# Altium PCB TL061main.PcbDoc
Units mil, origin at the board's own origin, x right, y up, seen from the top; angles counter-clockwise.
Board outline 1720 x 1335 mil, 2 copper layers (Top Layer, Bottom Layer); 8 components, 6 nets, 32 pads, 0 vias.
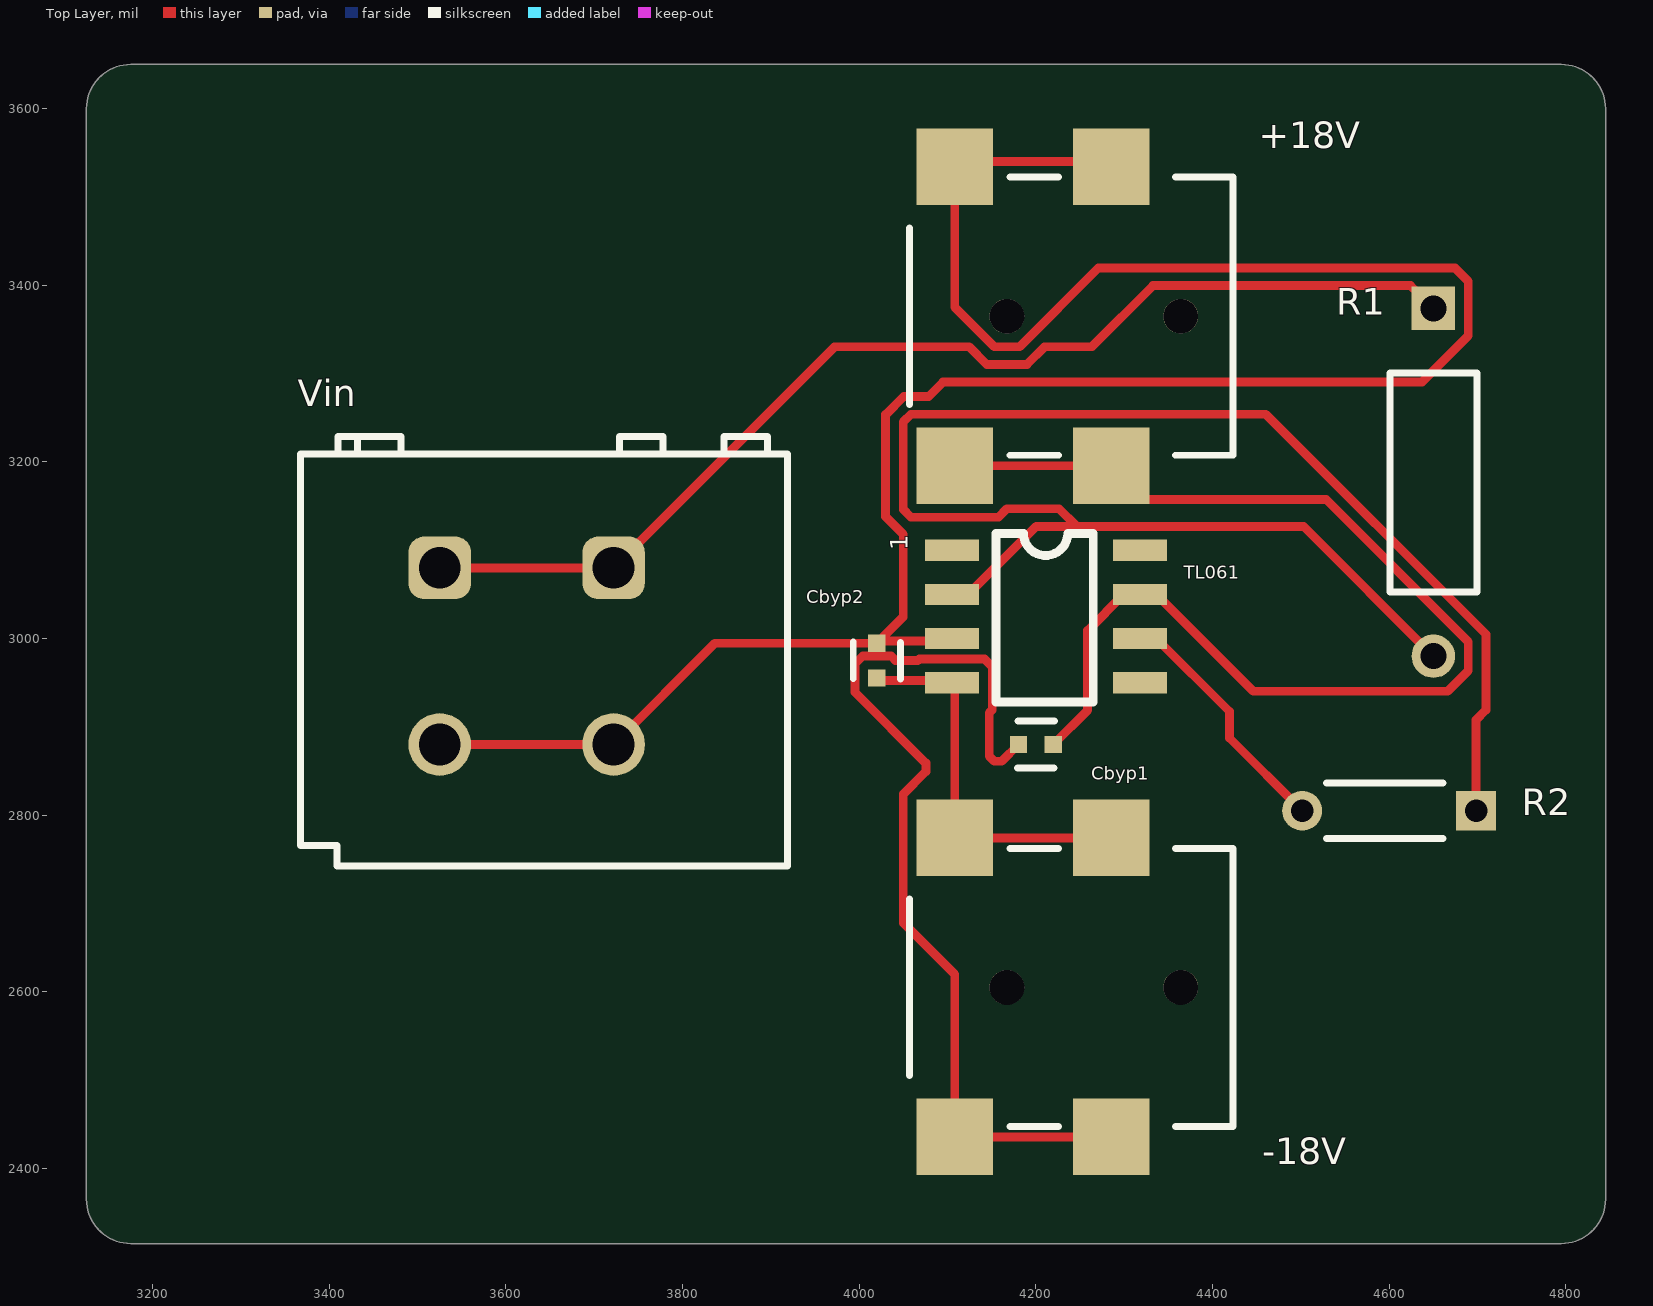
[diagram p0: Top Layer view]
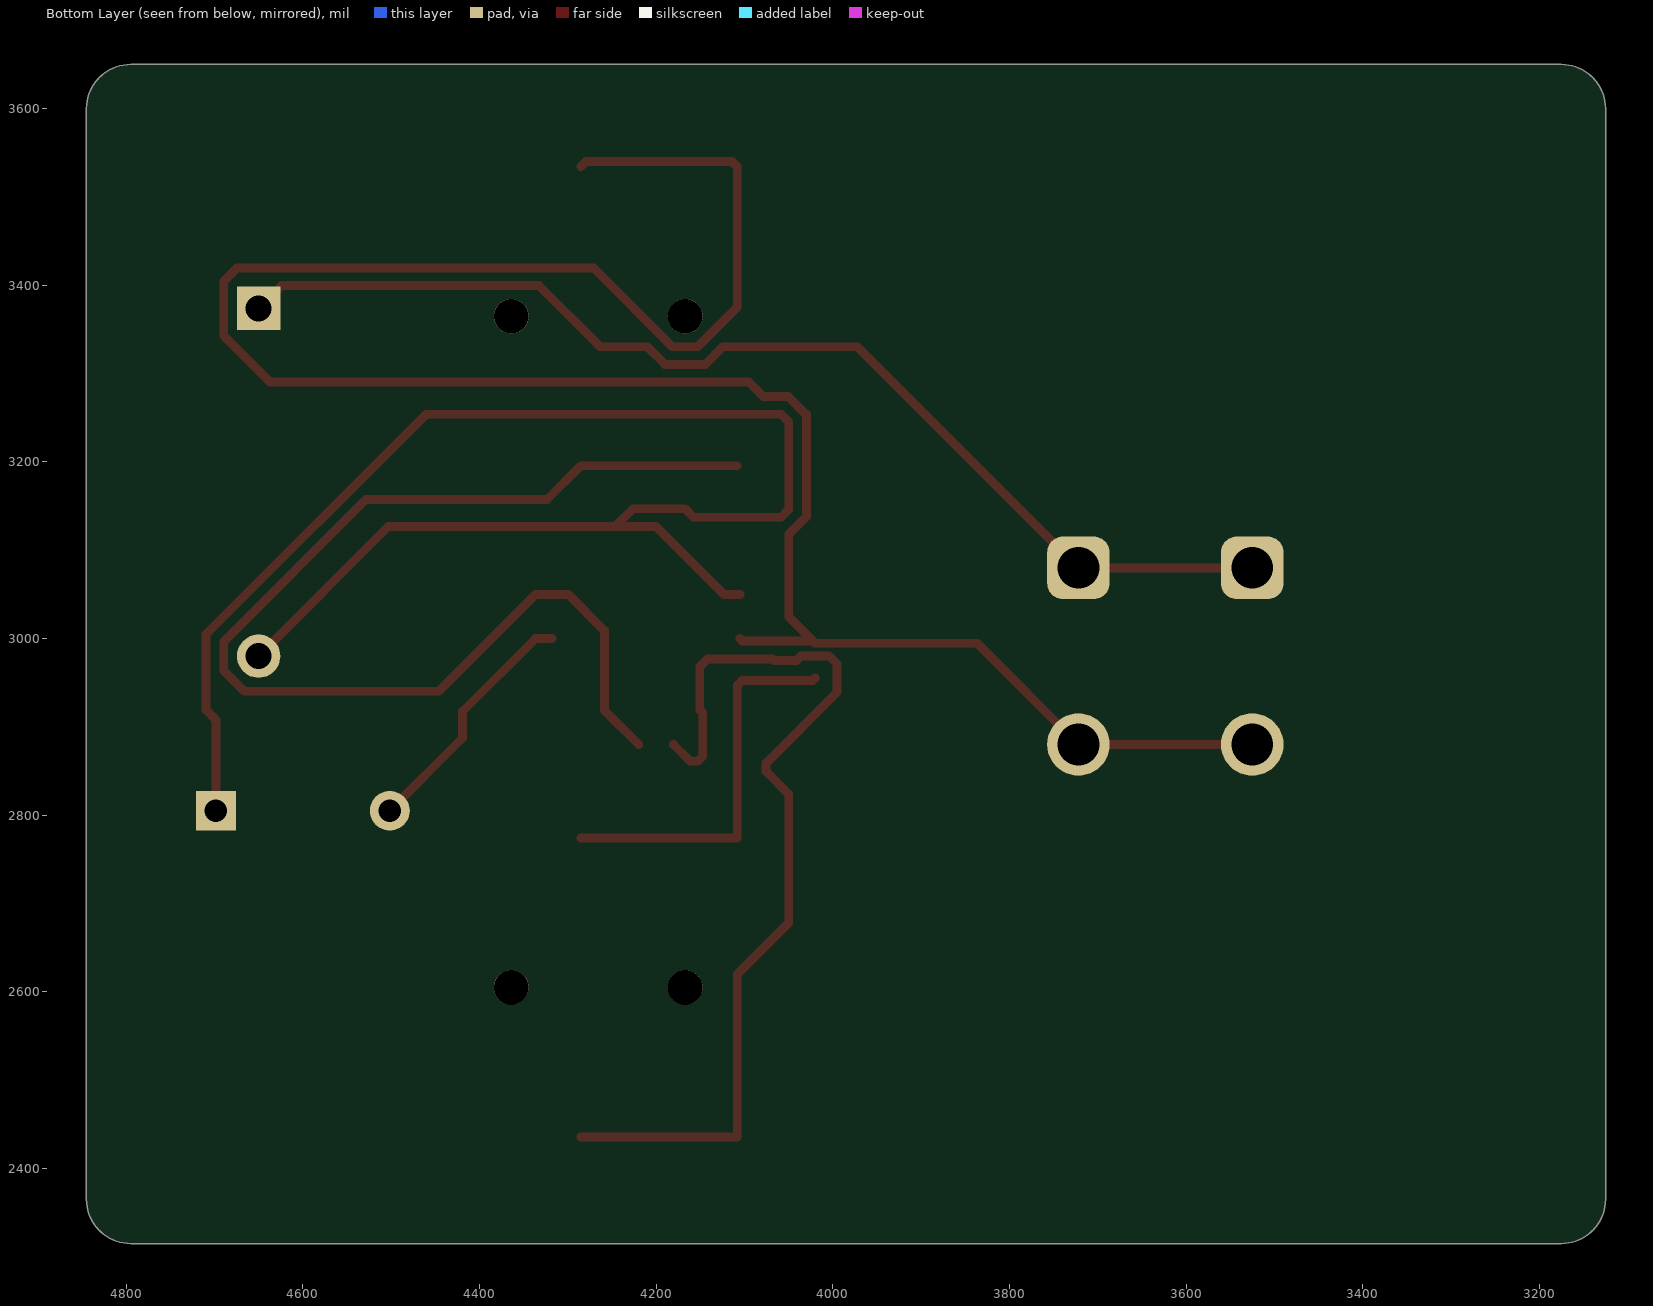
[diagram p1: Bottom Layer view, seen from below]
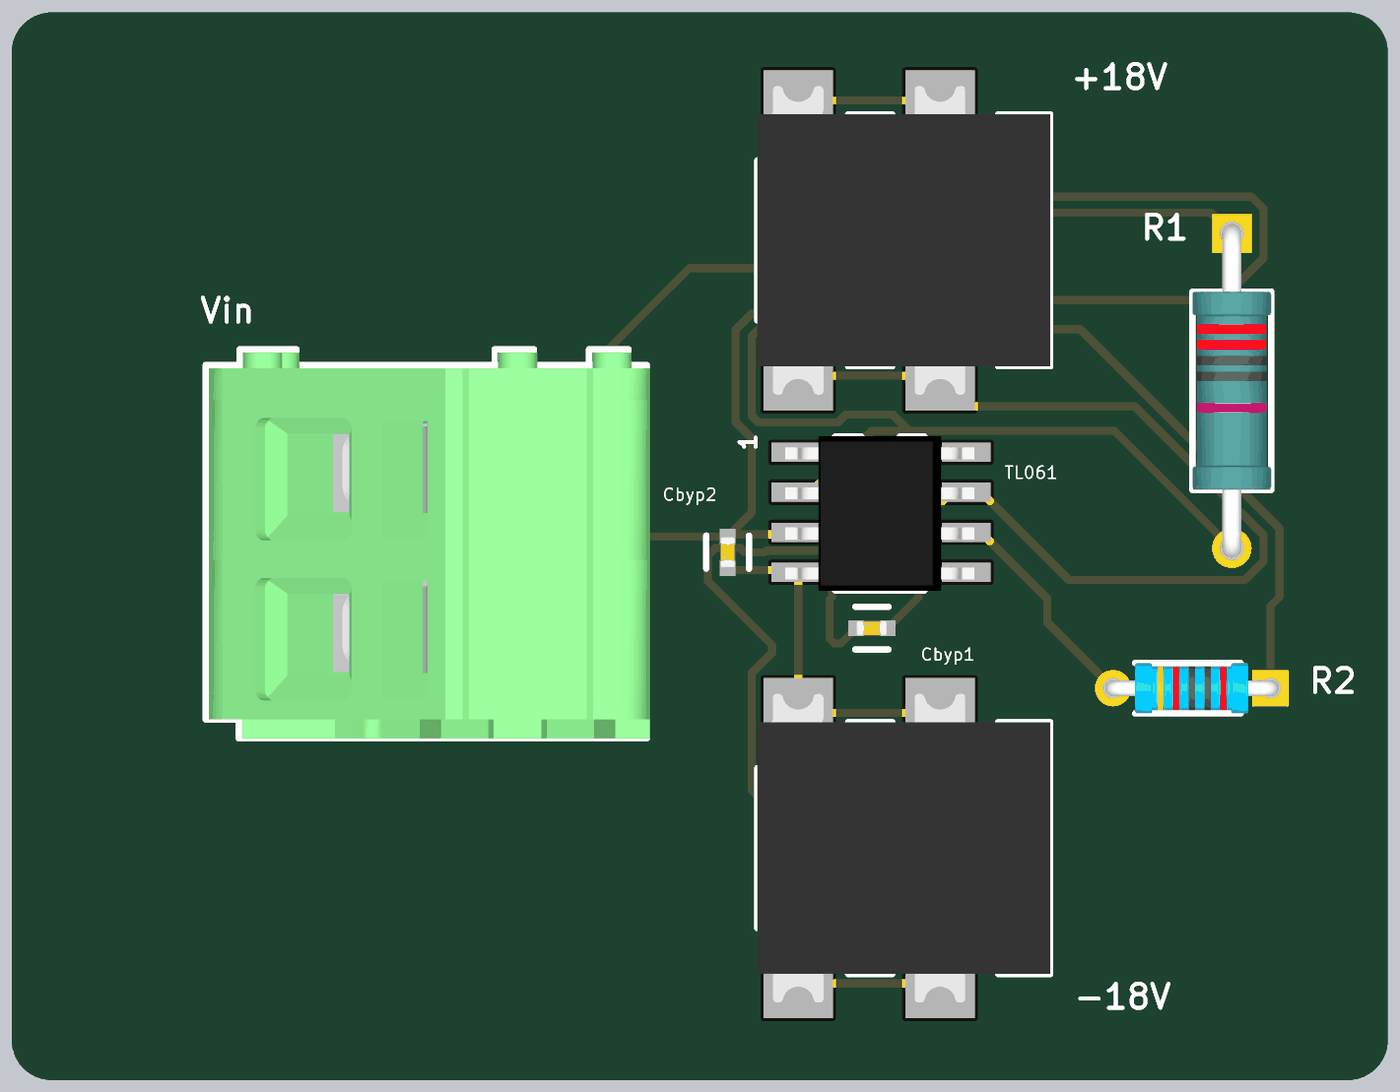
[diagram p2: 3D render of the assembled board from above, using the file's embedded part models]

## Layer stack, top to bottom
Top Solder: solder mask 0.4, Solder Resist, Dk 3.5
Top Layer: signal copper 1.4
Dielectric 1: dielectric 12.6, FR-4, Dk 4.8
Bottom Layer: signal copper 1.4
Bottom Solder: solder mask 0.4, Solder Resist, Dk 3.5

## Board outline
3125,2365 ccw(c3175,2365) 3175,2315 4795,2315 ccw(c4795,2365) 4845,2365 4845,3600 ccw(c4795,3600) 4795,3650 3175,3650 ccw(c3175,3600) 3125,3600

## Design rules (kind name [scope] priority, off if disabled: settings)
Clearance [All] p1: gap=10 ignorepadtopadclearanceinfootprint=FALSE
PolygonConnect [All] p1: connectstyle=Relief reliefconductorwidth=10 reliefentries=4 polygonreliefangle="90 Angle" airgapwidth=10
RoutingVias [All] p1: holewidth=28 width=50 viastyle="Through Hole" minholewidth=28 minwidth=50 maxholewidth=28 maxwidth=50
SolderMaskExpansion [All] p1: expansion=4 istentingtop=FALSE
SupplyNets "Schematic Supply Nets" [InNet('GND')] p1: voltage=0.000
Width [All] p1: maxlimit=10 minlimit=10 preferedwidth=10
30 further rules are at their usual default settings.

## Classes and differential pairs
component class TL061invertingamp: +18V -18V Cbyp1 Cbyp2 R1 R2 Vin

## Components (designator, comment, footprint, x,y, rotation, side; value= is the part's Value field where it differs from the comment)
+18V "694102107102" 694102107102 4240,3365 r90 top
-18V "694102107102" 694102107102 4240,2605 r90 top
Cbyp1 "0.1uF" FP-CC0402-MFG 4200,2880 r180 top value="100 nF"
Cbyp2 "0.1uF" FP-CC0402-MFG 4020,2975 r270 top value="100 nF"
R1 "10kOhm" FP-MBB0207-MFG 4650,3176.85 r270 top
R2 "20kOhm" FP-MRS1600-MFG 4600,2805 r180 top
TL061 "Inverting Amp" TLC061ACD 4105,3100 r0 top
Vin "15V" 691408520002B 3643.11,2975.67 r270 top

## Footprints (in the part's own frame and the unit in brackets; to place one, negate y for a bottom-side part, rotate by r counter-clockwise, add the part's x,y. Pads: shape width x height; smd on the part's side, far side on the other; paste and mask are expansions set on the pad)
691408520002B [mm] "Terminal block -  Screwless Push In, 2p"
  rrect50% 1.8x1.8 hole 1.2: 1(-2.65,2) 1(-2.65,-3)
  round 1.8 hole 1.2: 2(2.43,2) 2(2.43,-3)
  silkscreen extent -6.43,-7 5.93,7, body extent -6.33,-6.9 5.93,7.1, height 13.55
694102107102 [mm] "DC Power Jack Right Angled Low Profile SMT ?3.9 with 4 soldering pads & pegs"
  rect 2.2x2.2 smd: 1(-4.3,-1.15) 1(-4.3,3.35) 2(4.3,-1.15) 3(4.3,3.35)
  round 1 hole 1 unplated: MH1(0,1.85) MH2(0,-3.15)
  silkscreen extent -4,-4.65 4,4.65, body extent -4.9,-4.65 4.9,4.65, height 5.32
FP-CC0402-MFG [mm]
  rect 0.5x0.5 smd paste+0 mask+0: 1(-0.5,0) 2(0.5,0)
  silkscreen extent -0.53,-0.68 0.53,0.67, body extent -0.87,-0.48 0.87,0.48, height 0.25
FP-MBB0207-MFG [mm]
  rect 1.25x1.25 hole 0.75 paste-2539.97 mask+0: 1(-5,0)
  round 1.25 hole 0.75 paste-2539.97 mask+0: 2(5,0)
  silkscreen extent -3.15,-1.25 3.15,1.25, body extent -5.72,-1.35 5.72,1.35, height 0.25
FP-MRS1600-MFG [mm]
  rect 1.15x1.15 hole 0.65 paste-2539.97 mask+0: 1(-2.5,0)
  round 1.15 hole 0.65 paste-2539.97 mask+0: 2(2.5,0)
  silkscreen extent -1.55,-0.8 1.8,0.8, body extent -3.17,-0.9 3.17,0.9, height 0.25
TLC061ACD [mil]
  rect 61x24 smd: 1(0,0) 2(0,-50) 3(0,-100) 4(0,-150) 5(213,-150) 6(213,-100) 7(213,-50) 8(213,0)
  silkscreen extent 50,-172 160,19, body extent -13,-173 223,20, height 60

## Part data
+18V -18V: library part CMP-1502-00174-2, Color=Black, Current Rating=5A, Flammability Rating="UL94 V-0", Insulation Resistance=100MΩ, Max Operating Temperature=85°C, Min Operating Temperature=-40°C, Operating Supply Voltage=18V, Connector Type=Power, Contact Gender=Female, Contact Plating=Tin, Gender=Male, Housing Material=Polyamide, Mount="Surface Mount", NexarPartId=52645180, Packaging="Tape and Reel", REACH SVHC=Unknown, RoHS=Compliant, Shielding=Unshielded, Termination=SMD/SMT, Voltage Rating=18V, Voltage Rating (DC)=18V
Cbyp1 Cbyp2: library part CMP-03422-000048-1, "CAP CER 0.1UF 16V X7R 0402", Capacitance="100 nF", Manufacturer=YAGEO, Manufacturer Part Number=CC0402KRX7R7BB104, Package=CC0402, Temperature="-55°C to +125°C", Temperature Characteristic=X7R, Temperature Coefficient=30ppm/°C, Temperature Range High=+125°C, Temperature Range Low=-55°C, Tolerance=0.1, Voltage Rating="16 V", Automotive=No, Automotive Grade=NA, Category=Cap, ComponentLink2Description=Datasheet, ComponentLink2URL=http://www.yageo.com/documents/recent/UPY-GP_NP0_16V-to-50V_16.pdf, Device Class L1="Passive Components", Device Class L2=Capacitors, Device Class L3="Ceramic Capacitors", Digikey Description="CAP CER 0.1UF 16V X7R 0402", Footprint Url=http://www.yageo.com/exep/pages/download/literatures/UPY-C_GEN_24.pdf, Height=0.55mm, Ipc Land Pattern Name=CAPC10050X50, Lead Free=Yes, Material=Ceramic, Mouser Description="0402 0.1 uF 16 V ±10 % Tolerance X7R SMT Multilayer Ceramic Capacitor", Octopart=https://octopart.com/cc0402krx7r7bb104-yageo-42244624, RoHS=TRUE
R1: library part CMP-02408-000035-1, "RES 10K OHM 0.6W 1% AXIAL", Case/Package=Conformal, Max Operating Temperature=155°C, Max Power Dissipation=600mW, Min Operating Temperature=-55°C, Resistance=10kR, Resistance Tolerance=1%, Resistor Type="Metal Film", Temperature Coefficient=50ppm/°C, Voltage Rating=300V, Construction=Cylindrical, Contact Plating=Tin, Diameter=2.5mm, Features="Automotive AEC-Q200", Lead Free="Lead Free", Length=6.5mm, Military Standard=Not, Number of Terminations=2, Packaging="Tape and Reel", Power Rating=600mW, Radiation Hardening=No, RoHS Compliant=Yes, Series="MBB 0207 - Professional", Technology="THIN FILM", Termination=Axial, Tolerance=1%, Voltage Rating (DC)=300V
R2: library part CMP-02408-000019-1, "RES 20K OHM 0.4W 1% AXIAL", Case/Package=Conformal, Max Operating Temperature=155°C, Max Power Dissipation=400mW, Min Operating Temperature=-55°C, Resistance=20kR, Resistor Type="Metal Film", Temperature Coefficient=50ppm/°C, Tolerance=1%, Construction=Cylindrical, Contact Plating=Tin, Diameter=1.6mm, Length=3.6mm, Military Standard=Not, Mount="Through Hole", Number of Terminations=2, Packaging="Tape and Reel", Power Rating=400mW, Radiation Hardening=No, RoHS Compliant=Yes, Series=MRS16, Technology="THIN FILM", Termination=Axial
TL061: library part TL061ACD
Vin: library part CMP-03913-118042523-1, "691408520002B Terminal Block, Wtb, 2WAY, 28-12AWG;", Current Rating=15A, Max Operating Temperature=105°C, Min Operating Temperature=-40°C, Voltage Rating=300V, Contact Material="Nickel, Tin", Height=13.8mm, NexarPartId=118042523, Number of Contacts=2, Number of Rows=2

## Nets (pads, with @x,y where several pads share a name; then routed paths per layer and width w, separated by ;. In a path a pad name is that pad's centre, name@x,y a point inside that pad or via, vN(x,y) a via of type N, cw(c..) or ccw(c..) an arc to the next point about the centre after c; other vN are vias at no path point)
GND: +18V.2 +18V.3 -18V.1 Cbyp1.2 Cbyp2.1 TL061.3 Vin.2 | length 3741
  Top Layer w10: Vin.2@3525,2880 3721.85,2880 3836.54,2994.68 Cbyp2.1 Cbyp2.1@4022.66,2997.34 ; TL061.3 4102.34,2997.34 Cbyp2.1@4022.66,2997.34 ; Cbyp1.2 4161.33,2861.02 4153.05,2861.02 4147.19,2866.87 4147.19,2915.89 4150.5,2919.2 4150.5,2968.21 4141.71,2977 4068.29,2977 4066.29,2975 4041.21,2975 4036.06,2980.16 4003.94,2980.16 3995.16,2971.37 3995.16,2939.26 4075.47,2858.94 4075.47,2849.48 4049.8,2823.81 4049.8,2678.07 4108.11,2619.76 4108.11,2435.71 -18V.1@4285.27,2435.71 ; +18V.2 4279.56,3540 4113.82,3540 +18V.3 4108.11,3375 4152.8,3330.31 4181.53,3330.31 4270.9,3419.69 4674.44,3419.69 4689.61,3404.52 4689.61,3342.88 4637.04,3290.31 4094.89,3290.31 4078.59,3274.02 4050.3,3274.02 4029.8,3253.51 4029.8,3137.9 4049.8,3117.9 4049.8,3024.49 Cbyp2.1@4022.66,2997.34
Net+18V_1: +18V.1 Cbyp1.1 TL061.7 | length 1345
  Top Layer w10: +18V.1@4108.11,3195.71 4285.27,3195.71 4323.58,3157.4 4528.61,3157.4 4689.61,2996.41 4689.61,2963.59 4666.41,2940.39 4446.11,2940.39 4336.5,3050 TL061.7 4299.5,3050 4258.51,3009.01 4258.51,2918.83 Cbyp1.1
Net-18V_2: -18V.2 -18V.3 Cbyp2.2 TL061.4 | length 441.4
  Top Layer w10: Cbyp2.2 4022.66,2952.66 4102.34,2952.66 TL061.4 4108.11,2946.89 -18V.3 -18V.2
NetR1_1: R1.1 Vin.1 | length 1284.7
  Top Layer w10: Vin.1@3525,3080 3721.85,3080 3972.17,3330.31 4124.51,3330.31 4144.51,3310.31 4189.81,3310.31 4209.81,3330.31 4263.41,3330.31 4332.78,3399.69 4624.02,3399.69 R1.1
NetR1_2: R1.2 R2.1 TL061.2 | length 1920.1
  Top Layer w10: TL061.2 4123.5,3050 4200.5,3127 4246.15,3127 ; R1.2 4503,3127 4246.15,3127 ; R2.1 4698.43,2908.07 4709.61,2919.25 4709.61,3004.69 4460.28,3254.02 4058.59,3254.02 4049.8,3245.23 4049.8,3146.19 4058.59,3137.4 4157.63,3137.4 4167.23,3147 4226.15,3147 4246.15,3127
NetR2_2: R2.2 TL061.6 | length 281.9
  Top Layer w10: TL061.6 4336.5,3000 4419.16,2917.34 4419.16,2887.41 R2.2
pads on no net: +18V.MH1 +18V.MH2 -18V.MH1 -18V.MH2 TL061.1 TL061.5 TL061.8

## Silkscreen, mask and mechanical layers (free items; w line width, h text height)
Mechanical 1:
  lines w10: 3125,2365 ccw(c3175,2365) 3175,2315 3335,2315 4650,2315 4795,2315 ccw(c4795,2365) 4845,2365 4845,3600 ccw(c4795,3600) 4795,3650 3175,3650 ccw(c3175,3600) 3125,3600 3125,2365

## Text inside footprints (layer, text, board x,y; h text height)
TL061: Top Overlay "1" at 4055,3100 h20 r90